# Altium PCB newUA_6.PcbDoc
Units mm, origin at the board's own origin, x right, y up, seen from the top; angles counter-clockwise.
Board outline 51.43 x 211.58 mm, 2 copper layers (Top Layer, Bottom Layer); 52 components, 48 nets, 274 pads, 0 vias.
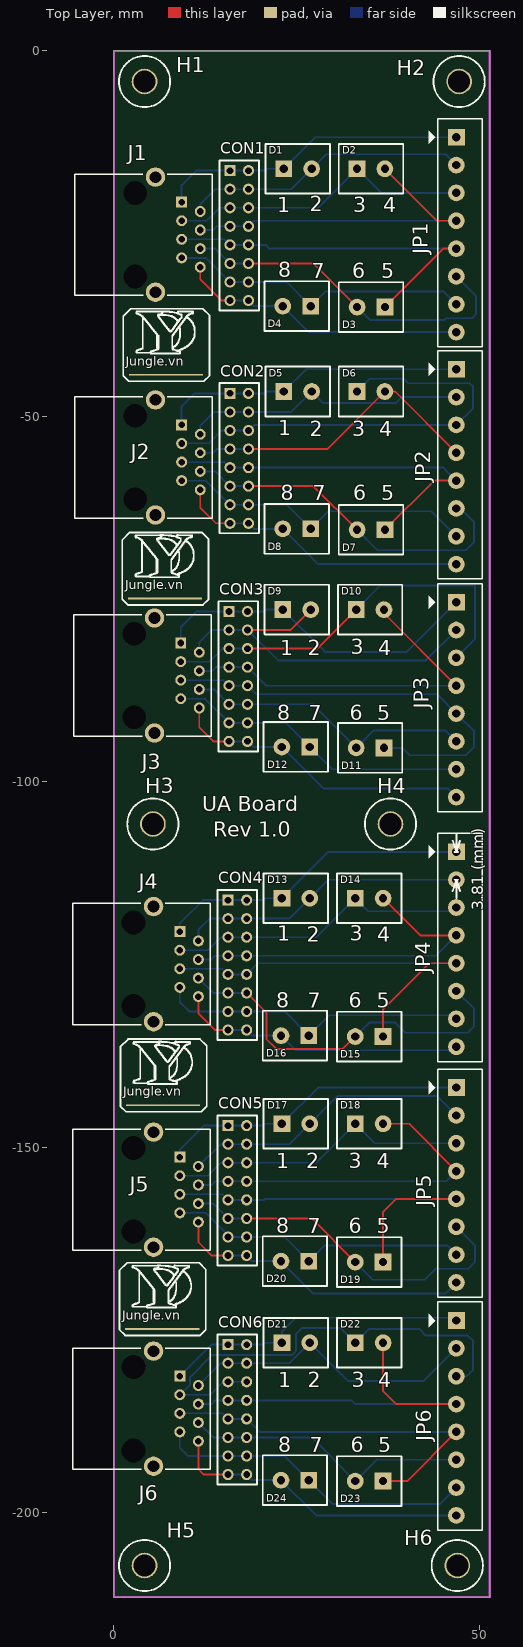
[diagram p0: Top Layer view]
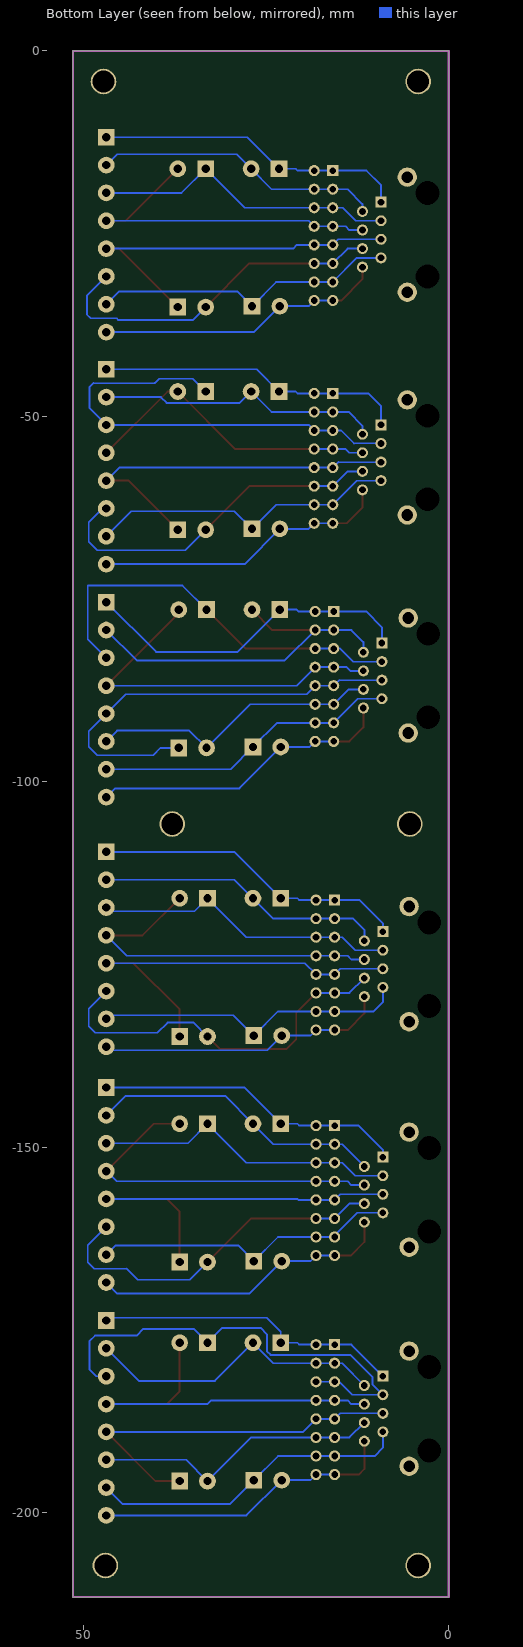
[diagram p1: Bottom Layer view, seen from below]
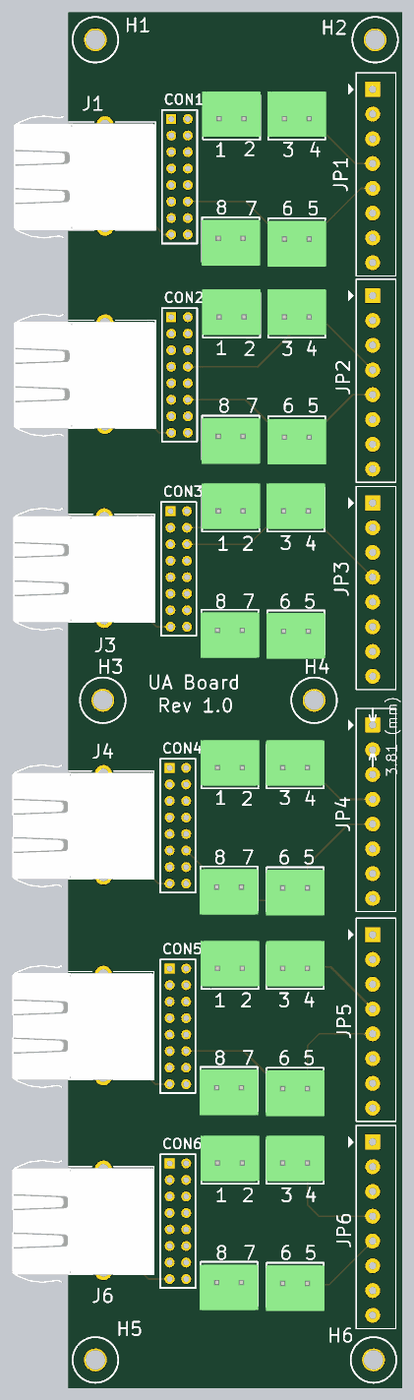
[diagram p2: 3D render of the assembled board from above, using the file's embedded part models]

## Layer stack, top to bottom
Top Solder: solder mask 0.0102, Solder Resist, Dk 3.5
Top Layer: signal copper 0.0356
Dielectric 1: dielectric 0.32, FR-4, Dk 4.8
Bottom Layer: signal copper 0.0356
Bottom Solder: solder mask 0.0102, Solder Resist, Dk 3.5

## Board outline
0,-211.582 51.435,-211.582 51.435,0 0,0

## Design rules (kind name [scope] priority, off if disabled: settings)
Clearance [All] p1: gap=0.254
ComponentClearance [All] p1 off: gap=0.254 collisioncheckmode=3 verticalgap=0.254 showdistances=FALSE
HoleSize [All] p1: absolutevalues=TRUE maxlimit=3.81 minlimit=0.025 maxpercent=80.000 minpercent=20.000
PolygonConnect [All] p1: connectstyle=Relief reliefconductorwidth=0.254 reliefentries=4 polygonreliefangle="90 Angle" airgapwidth=0.254
RoutingVias [All] p1: holewidth=0.61 width=1.016 viastyle="Through Hole" minholewidth=0.61 minwidth=1.016 maxholewidth=3.81 maxwidth=3.81
ShortCircuit [All] p1: allowed=TRUE
SilkToBoardRegionClearance [All] p1 off:
SilkToSilkClearance [All] p1 off: silktosilkclearance=0.254
SilkToSolderMaskClearance [IsPad] p1: minsilkscreentomaskgap=0.051 clearancetoexposedcopper=TRUE
SolderMaskExpansion [All] p1: expansion=0.102
Width [All] p1: maxlimit=1.016 minlimit=0.203 preferedwidth=0.254
24 further rules are at their usual default settings.

## Classes and differential pairs
component class newUA_6: CON1 CON2 CON3 CON4 CON5 CON6 D1 D2 D3 D4 D5 D6 D7 D8 D9 D10 D11 D12 D13 D14 D15 D16 D17 D18 D19 D20 D21 D22 D23 D24 H1 H2 H3 H4 H5 H6 J1 J2 J3 J4 J5 J6 JP1 JP2 JP3 JP4 JP5 JP6

## Components (designator, comment, footprint, x,y, rotation, side; value= is the part's Value field where it differs from the comment)
CON1 "Con8x2" HEAD8x2 15.875,-16.383 r0 top locked
CON2 "Con8x2" HEAD8x2 15.875,-46.863 r0 top locked (schematic designator CON1)
CON3 "Con8x2" HEAD8x2 15.748,-76.708 r0 top locked (schematic designator CON1)
CON4 "Con8x2" HEAD8x2 15.621,-116.205 r0 top locked (schematic designator CON1)
CON5 "Con8x2" HEAD8x2 15.621,-147.066 r0 top locked (schematic designator CON1)
CON6 "Con8x2" HEAD8x2 15.621,-177.038 r0 top locked (schematic designator CON1)
D1 "DOMINO1" DOMINO2_SMALL 23.241,-16.129 r0 top locked
D2 "DOMINO2" DOMINO2_SMALL 33.274,-16.129 r0 top locked
D3 "DOMINO3" DOMINO2_SMALL 37.084,-35.052 r180 top locked
D4 "DOMINO4" DOMINO2_SMALL 26.924,-34.925 r180 top locked
D5 "D5" DOMINO2_SMALL 23.241,-46.609 r0 top locked (schematic designator D1)
D6 "D6" DOMINO2_SMALL 33.274,-46.609 r0 top locked (schematic designator D2)
D7 "D7" DOMINO2_SMALL 37.084,-65.532 r180 top locked (schematic designator D3)
D8 "D8" DOMINO2_SMALL 26.924,-65.405 r180 top locked (schematic designator D4)
D9 "D9" DOMINO2_SMALL 23.114,-76.454 r0 top locked (schematic designator D1)
D10 "D10" DOMINO2_SMALL 33.147,-76.454 r0 top locked (schematic designator D2)
D11 "D11" DOMINO2_SMALL 36.957,-95.377 r180 top locked (schematic designator D3)
D12 "D12" DOMINO2_SMALL 26.797,-95.25 r180 top locked (schematic designator D4)
D13 "D13" DOMINO2_SMALL 22.987,-115.951 r0 top locked (schematic designator D1)
D14 "D14" DOMINO2_SMALL 33.02,-115.951 r0 top locked (schematic designator D2)
D15 "D15" DOMINO2_SMALL 36.83,-134.874 r180 top locked (schematic designator D3)
D16 "D16" DOMINO2_SMALL 26.67,-134.747 r180 top locked (schematic designator D4)
D17 "D17" DOMINO2_SMALL 22.987,-146.812 r0 top locked (schematic designator D1)
D18 "D18" DOMINO2_SMALL 33.02,-146.812 r0 top locked (schematic designator D2)
D19 "D19" DOMINO2_SMALL 36.83,-165.735 r180 top locked (schematic designator D3)
D20 "D20" DOMINO2_SMALL 26.67,-165.608 r180 top locked (schematic designator D4)
D21 "D21" DOMINO2_SMALL 22.987,-176.784 r0 top locked (schematic designator D1)
D22 "D22" DOMINO2_SMALL 33.02,-176.784 r0 top locked (schematic designator D2)
D23 "D23" DOMINO2_SMALL 36.83,-195.707 r180 top locked (schematic designator D3)
D24 "D24" DOMINO2_SMALL 26.67,-195.58 r180 top locked (schematic designator D4)
H1 "Hole 3mm" Hole_3mm 4.191,-4.191 r0 top (schematic designator H7)
H2 "Hole 3mm" Hole_3mm 47.244,-4.191 r0 top (schematic designator H8)
H3 "Hole 3mm" Hole_3mm 5.334,-105.791 r0 top (schematic designator H9)
H4 "Hole 3mm" Hole_3mm 37.846,-105.791 r0 top (schematic designator H10)
H5 "Hole 3mm" Hole_3mm 4.191,-207.264 r0 top (schematic designator H11)
H6 "Hole 3mm" Hole_3mm 46.99,-207.264 r0 top (schematic designator H12)
J1 "CON-RJ45-10-RA" RJ45_TME 7.366,-25.146 r270 top locked
J2 "CON-RJ45-10-RA" RJ45_TME 7.366,-55.626 r270 top locked (schematic designator J1)
J3 "CON-RJ45-10-RA" RJ45_TME 7.239,-85.471 r270 top locked (schematic designator J1)
J4 "CON-RJ45-10-RA" RJ45_TME 7.112,-124.968 r270 top locked (schematic designator J1)
J5 "CON-RJ45-10-RA" RJ45_TME 7.112,-155.829 r270 top locked (schematic designator J1)
J6 "CON-RJ45-10-RA" RJ45_TME 7.112,-185.801 r270 top locked (schematic designator J1)
JP1 "JP8" CON8mod 46.863,-11.811 r270 top
JP2 "JP8" CON8mod 46.863,-43.561 r270 top
JP3 "JP8" CON8mod 46.863,-75.438 r270 top
JP4 "JP8" CON8mod 46.863,-109.601 r270 top
JP5 "JP8" CON8mod 46.863,-141.859 r270 top
JP6 "JP8" CON8mod 46.863,-173.736 r270 top
? "Jungle" Jungle 1178.56,1157.097 r0 top
? "Jungle" Jungle 1178.179,1057.148 r0 top
? "Jungle" Jungle 1178.687,1187.704 r0 top
? "Jungle" Jungle 1178.306,1087.755 r0 top

## Footprints (in the part's own frame and the unit in brackets; to place one, negate y for a bottom-side part, rotate by r counter-clockwise, add the part's x,y. Pads: shape width x height; smd on the part's side, far side on the other; paste and mask are expansions set on the pad)
CON8mod [mm]
  rect 2.29x2.29 hole 1.14: 1(0,0)
  round 2.29 hole 1.14: 2(3.81,0) 3(7.62,0) 4(11.43,0) 5(15.24,0) 6(19.05,0) 7(22.86,0) 8(26.67,0)
  silkscreen extent -2.54,-3.8 28.7,3.56
DOMINO2_SMALL [mm]
  rect 2.29x2.29 hole 1.14: 1(0,0)
  round 2.29 hole 1.14: 2(3.81,0)
  silkscreen extent -2.5,-3.4 6.31,3.4, body extent -2.6,-2.99 6.41,4.01, height 7.25
HEAD8x2 [mil]
  rect 60x60 hole 36: 1(0,0)
  round 60 hole 36: 2(0,-100) 3(0,-200) 4(0,-300) 5(0,-400) 6(0,-500) 7(0,-600) 8(0,-700) 9(100,-700) 10(100,-600) 11(100,-500) 12(100,-400) 13(100,-300) 14(100,-200) 15(100,-100) 16(100,0)
  silkscreen extent -57,-754 156,55
Hole_3mm [mil]
  round 138 hole 118: 0(0,0)
  silkscreen extent -138,-138 138,138
Jungle [mil]
  rect 400x10 smd: 1(-46125,-48505)
  silkscreen extent -46355,-48540 -45890,-48149
RJ45_TME [mm] "no tranformer no LEDs"
  rect 1.5x1.5 hole 0.9: 1(-4.445,1.905)
  round 1.5 hole 0.9: 2(-3.175,4.445) 3(-1.905,1.905) 4(-0.635,4.445) 5(0.635,1.905) 6(1.905,4.445) 7(3.175,1.905) 8(4.445,4.445)
  round 2.65 hole 1.6: MH1(-7.875,-1.685) MH2(7.875,-1.685)
  round 2.95 hole 3.25 unplated: MH3(-5.715,-4.445) MH4(5.715,-4.445)
  Bottom Layer lines w0.3: -5.7,-4.46 -5.715,-4.445
  silkscreen extent -8.3,-12.72 8.3,6.08, body extent -9.35,-15.75 9.65,6.1, height 15.17

## Part data
D1 D2 D3 D4 D5 D6 D7 D8 D9 D10 D11 D12 D13 D14 D15 D16 D17 D18 D19 D20 D21 D22 D23 D24: library part "Domino 2"
H1 H2 H3 H4 H5 H6: library part Hole_3mm
J1 J2 J3 J4 J5 J6: "Right Angle, Standard Profile, External Shield PCB Jack"
JP1 JP2 JP3 JP4 JP5 JP6: library part Con8, "Connector 8"

## Nets (pads, with @x,y where several pads share a name; then routed paths per layer and width w, separated by ;. In a path a pad name is that pad's centre, name@x,y a point inside that pad or via, vN(x,y) a via of type N, cw(c..) or ccw(c..) an arc to the next point about the centre after c; other vN are vias at no path point)
1: CON1.1 CON1.16 D1.1 J1.1 JP1.1 | length 42.6
  Bottom Layer w0.254: J1.1 9.271,-18.37 11.258,-16.383 CON1.1 CON1.16 20.701,-16.383 20.955,-16.129 D1.1 27.559,-11.811 JP1.1
2: CON1.2 CON1.15 D1.2 J1.2 JP1.2 | length 39.5
  Bottom Layer w0.254: J1.2 11.811,-20.955 13.843,-18.923 CON1.2 CON1.15 24.257,-18.923 D1.2 29.032,-14.148 45.39,-14.148 JP1.2
2_1: CON2.1 CON2.16 D5.1 J2.1 JP2.1 | length 42.2
  Bottom Layer w0.254: J2.1 9.271,-48.641 11.049,-46.863 CON2.1 CON2.16 20.701,-46.863 20.955,-46.609 D5.1 26.289,-43.561 JP2.1
2_2: CON2.2 CON2.15 D5.2 J2.2 JP2.2 | length 39.1
  Bottom Layer w0.254: J2.2 11.811,-51.308 13.716,-49.403 CON2.2 CON2.15 24.257,-49.403 D5.2 28.6,-48.158 38.608,-48.158 39.395,-47.371 JP2.2
2_3: CON2.3 CON2.14 D6.1 J2.3 JP2.3 | length 61.9
  Bottom Layer w0.203: J2.3 12.954,-53.721 ; 40.259,-45.466 48.641,-45.466
  Bottom Layer w0.254: 12.954,-53.721 14.732,-51.943 CON2.3 CON2.14 19.177,-51.181 JP2.3 49.149,-48.895 49.149,-45.974 48.641,-45.466 ; D6.1 35.027,-44.856 39.649,-44.856 40.259,-45.466
2_4: CON2.4 CON2.13 D6.2 J2.4 JP2.4 | length 42
  Top Layer w0.254: CON2.13 29.21,-54.483 D6.2 38.481,-46.609 JP2.4
  Bottom Layer w0.254: J2.4 13.589,-54.991 14.097,-54.483 CON2.4 CON2.13
2_5: CON2.5 CON2.12 D7.1 J2.5 JP2.5 | length 51.2
  Top Layer w0.254: D7.1 43.815,-58.801 JP2.5
  Bottom Layer w0.203: J2.5 15.113,-56.261
  Bottom Layer w0.254: 15.113,-56.261 CON2.5 CON2.12 45.085,-57.023 JP2.5
2_6: CON2.6 CON2.11 D7.2 J2.6 JP2.6 | length 48.3
  Top Layer w0.254: CON2.11 27.305,-59.563 D7.2
  Bottom Layer w0.203: 36.068,-68.326 48.133,-68.326
  Bottom Layer w0.254: J2.6 13.843,-57.531 CON2.6 CON2.11 ; D7.2 36.068,-68.326 ; JP2.6 47.371,-62.611 49.276,-64.516 49.276,-67.183 48.133,-68.326
2_7: CON2.7 CON2.10 D8.1 J2.7 JP2.7 | length 42.7
  Bottom Layer w0.203: J2.7 12.573,-58.801 CON2.7
  Bottom Layer w0.254: CON2.7 CON2.10 23.622,-62.103 D8.1 29.337,-62.992 43.434,-62.992 JP2.7
2_8: CON2.8 CON2.9 D8.2 J2.8 JP2.8 | length 40.7
  Top Layer w0.254: J2.8 11.811,-62.484 13.97,-64.643 CON2.8
  Bottom Layer w0.254: CON2.8 CON2.9 19.177,-65.405 D8.2 27.94,-70.231 JP2.8
3: CON1.3 CON1.14 D2.1 J1.3 JP1.3 | length 41.9
  Bottom Layer w0.254: J1.3 12.7,-23.241 14.478,-21.463 CON1.3 CON1.14 27.94,-21.463 D2.1 36.576,-19.431 JP1.3
3_1: CON3.1 CON3.16 D9.1 J3.1 JP3.1 | length 46.1
  Bottom Layer w0.254: J3.1 9.144,-78.867 11.303,-76.708 CON3.1 CON3.16 20.574,-76.708 20.828,-76.454 D9.1 28.905,-82.245 40.056,-82.245 JP3.1
3_2: CON3.2 CON3.15 D9.2 J3.2 JP3.2 | length 50.5
  Top Layer w0.254: CON3.15 24.13,-79.248 D9.2
  Bottom Layer w0.254: J3.2 11.684,-80.899 13.335,-79.248 CON3.2 CON3.15 22.454,-83.414 42.697,-83.414 JP3.2
3_3: CON3.3 CON3.14 D10.1 J3.3 JP3.3 | length 55.5
  Top Layer w0.254: CON3.14 27.813,-81.788 D10.1
  Bottom Layer w0.203: J3.3 13.081,-83.566
  Bottom Layer w0.254: 13.081,-83.566 14.859,-81.788 CON3.3 CON3.14 ; D10.1 36.449,-73.152 49.403,-73.152 49.403,-80.518 JP3.3
3_4: CON3.4 CON3.13 D10.2 J3.4 JP3.4 | length 51
  Top Layer w0.254: D10.2 36.957,-76.962 JP3.4
  Bottom Layer w0.254: J3.4 13.462,-84.836 13.97,-84.328 CON3.4 CON3.13 20.828,-86.868 JP3.4
3_5: CON3.5 CON3.12 D11.1 J3.5 JP3.5 | length 58.4
  Bottom Layer w0.203: J3.5 14.986,-86.106 ; 40.462,-96.393 48.133,-96.393 49.276,-95.25
  Bottom Layer w0.254: 14.986,-86.106 CON3.5 CON3.12 19.456,-88.036 44.221,-88.036 JP3.5 49.276,-93.091 49.276,-95.25 ; D11.1 39.446,-95.377 40.462,-96.393
3_6: CON3.6 CON3.11 D11.2 J3.6 JP3.6 | length 40.1
  Bottom Layer w0.254: J3.6 13.716,-87.376 CON3.6 CON3.11 27.178,-89.408 D11.2 35.509,-93.015 45.39,-93.015 JP3.6
3_7: CON3.7 CON3.10 D12.1 J3.7 JP3.7 | length 41.7
  Bottom Layer w0.203: J3.7 12.446,-88.646 CON3.7
  Bottom Layer w0.254: CON3.7 CON3.10 23.495,-91.948 D12.1 29.845,-98.298 JP3.7
3_8: CON3.8 CON3.9 D12.2 J3.8 JP3.8 | length 41.8
  Top Layer w0.254: J3.8 11.684,-92.583 13.589,-94.488 CON3.8
  Bottom Layer w0.254: CON3.8 CON3.9 19.05,-95.25 D12.2 28.651,-100.914 45.669,-100.914 JP3.8
4: CON1.4 CON1.13 D2.2 J1.4 JP1.4 | length 48.3
  Top Layer w0.254: D2.2 44.196,-23.241 JP1.4
  Bottom Layer w0.254: J1.4 13.589,-24.511 14.097,-24.003 CON1.4 CON1.13 19.177,-23.241 JP1.4
4_1: CON4.1 CON4.16 D13.1 J4.1 JP4.1 | length 43
  Bottom Layer w0.254: J4.1 9.017,-119.38 12.192,-116.205 CON4.1 CON4.16 20.447,-116.205 20.701,-115.951 D13.1 29.337,-109.601 JP4.1
4_2: CON4.2 CON4.15 D13.2 J4.2 JP4.2 | length 39.7
  Bottom Layer w0.254: J4.2 11.557,-120.269 13.081,-118.745 CON4.2 CON4.15 24.003,-118.745 D13.2 29.337,-113.411 JP4.2
4_3: CON4.3 CON4.14 D14.1 J4.3 JP4.3 | length 41.7
  Bottom Layer w0.203: J4.3 12.827,-123.063 14.605,-121.285
  Bottom Layer w0.254: 14.605,-121.285 CON4.3 CON4.14 27.686,-121.285 D14.1 34.798,-117.729 46.355,-117.729 JP4.3
4_4: CON4.4 CON4.13 D14.2 J4.4 JP4.4 | length 48.8
  Top Layer w0.254: D14.2 41.91,-121.031 JP4.4
  Bottom Layer w0.254: J4.4 13.335,-124.333 13.843,-123.825 CON4.4 CON4.13 44.069,-123.825 JP4.4
4_5: CON4.5 CON4.12 D15.1 J4.5 JP4.5 | length 55.2
  Top Layer w0.254: D15.1 36.83,-131.166 43.155,-124.841 JP4.5
  Bottom Layer w0.203: J4.5 14.859,-125.603
  Bottom Layer w0.254: 14.859,-125.603 CON4.5 CON4.12 19.685,-124.841 JP4.5
4_6: CON4.6 CON4.11 D15.2 J4.6 JP4.6 | length 52.1
  Top Layer w0.254: CON4.11 20.879,-131.623 20.879,-135.255 22.2,-136.576 31.318,-136.576 D15.2
  Bottom Layer w0.203: 39.878,-134.366 48.387,-134.366
  Bottom Layer w0.254: J4.6 13.589,-128.905 CON4.6 CON4.11 ; D15.2 34.925,-132.969 38.481,-132.969 39.878,-134.366 ; JP4.6 49.276,-131.064 49.276,-133.477 48.387,-134.366
4_7: CON4.7 CON4.10 D16.1 J4.7 JP4.7 | length 43.1
  Bottom Layer w0.254: J4.7 9.017,-130.175 10.287,-131.445 CON4.7 CON4.10 23.368,-131.445 D16.1 29.464,-131.953 46.355,-131.953 JP4.7
4_8: CON4.8 CON4.9 D16.2 J4.8 JP4.8 | length 40.2
  Top Layer w0.254: J4.8 11.557,-131.699 13.843,-133.985 CON4.8
  Bottom Layer w0.254: CON4.8 CON4.9 18.923,-134.747 D16.2 24.867,-136.754 46.863,-136.754 JP4.8
5: CON1.5 CON1.12 D3.1 J1.5 JP1.5 | length 51.2
  Top Layer w0.254: D3.1 45.085,-27.051 JP1.5
  Bottom Layer w0.254: J1.5 15.113,-25.781 CON1.5 CON1.12 20.777,-26.543 21.285,-27.051 JP1.5
5_1: CON5.1 CON5.16 D17.1 J5.1 JP5.1 | length 42.4
  Bottom Layer w0.254: J5.1 9.017,-150.368 12.319,-147.066 CON5.1 CON5.16 20.447,-147.066 20.701,-146.812 D17.1 27.94,-141.859 JP5.1
5_2: CON5.2 CON5.15 D17.2 J5.2 JP5.2 | length 40.4
  Bottom Layer w0.254: J5.2 14.605,-149.606 CON5.2 CON5.15 24.003,-149.606 D17.2 30.607,-143.002 44.196,-143.002 JP5.2
5_3: CON5.3 CON5.14 D18.1 J5.3 JP5.3 | length 41.9
  Bottom Layer w0.203: J5.3 12.827,-153.924
  Bottom Layer w0.254: 12.827,-153.924 14.605,-152.146 CON5.3 CON5.14 27.686,-152.146 D18.1 35.687,-149.479 JP5.3
5_4: CON5.4 CON5.13 D18.2 J5.4 JP5.4 | length 48.8
  Top Layer w0.254: D18.2 40.386,-146.812 JP5.4
  Bottom Layer w0.254: J5.4 13.335,-155.194 13.843,-154.686 CON5.4 CON5.13 45.466,-154.686 JP5.4
5_5: CON5.5 CON5.12 D19.1 J5.5 JP5.5 | length 55.8
  Top Layer w0.254: D19.1 36.83,-158.877 38.608,-157.099 JP5.5
  Bottom Layer w0.203: J5.5 14.859,-156.464
  Bottom Layer w0.254: 14.859,-156.464 CON5.5 CON5.12 20.574,-157.226 20.701,-157.099 JP5.5
5_6: CON5.6 CON5.11 D19.2 J5.6 JP5.6 | length 49
  Top Layer w0.254: CON5.11 27.051,-159.766 D19.2
  Bottom Layer w0.203: 44.069,-166.624 48.514,-166.624
  Bottom Layer w0.254: J5.6 13.589,-157.734 CON5.6 CON5.11 ; D19.2 35.433,-168.148 42.545,-168.148 44.069,-166.624 ; JP5.6 49.403,-163.449 49.403,-165.735 48.514,-166.624
5_7: CON5.7 CON5.10 D20.1 J5.7 JP5.7 | length 42.1
  Bottom Layer w0.203: J5.7 12.552,-159.004
  Bottom Layer w0.254: 12.552,-159.004 15.621,-162.073 CON5.7 CON5.10 23.368,-162.306 D20.1 28.829,-163.449 45.593,-163.449 JP5.7
5_8: CON5.8 CON5.9 D20.2 J5.8 JP5.8 | length 41.6
  Top Layer w0.254: J5.8 11.557,-162.992 13.411,-164.846 CON5.8
  Bottom Layer w0.254: CON5.8 CON5.9 18.923,-165.608 D20.2 27.305,-170.053 45.339,-170.053 JP5.8
6: CON1.6 CON1.11 D3.2 J1.6 JP1.6 | length 48.4
  Top Layer w0.254: CON1.11 27.305,-29.083 D3.2
  Bottom Layer w0.254: J1.6 13.843,-27.051 CON1.6 CON1.11 ; D3.2 35.052,-36.83 45.212,-36.83 45.466,-36.576 49.022,-36.576 49.53,-36.068 49.53,-33.528 JP1.6
6_1: CON6.1 CON6.16 D21.1 J6.1 JP6.1 | length 42.2
  Bottom Layer w0.254: J6.1 13.335,-177.038 CON6.1 CON6.16 20.447,-177.038 20.701,-176.784 D21.1 22.987,-175.26 24.892,-173.355 46.482,-173.355 JP6.1
6_2: CON6.2 CON6.15 D21.2 J6.2 JP6.2 | length 41.7
  Bottom Layer w0.254: J6.2 14.605,-179.578 CON6.2 CON6.15 24.003,-179.578 D21.2 32.004,-181.991 42.418,-181.991 JP6.2
6_3: CON6.3 CON6.14 D22.1 J6.3 JP6.3 | length 64.7
  Bottom Layer w0.203: J6.3 13.208,-183.896
  Bottom Layer w0.254: J6.3 10.414,-182.499 10.414,-181.483 13.462,-178.435 24.384,-178.435 24.892,-177.927 24.892,-175.616 25.756,-174.752 30.988,-174.752 D22.1 34.925,-174.879 41.783,-174.879 42.697,-175.793 48.412,-175.793 49.149,-176.53 49.149,-180.467 48.26,-181.356 JP6.3 ; 13.208,-183.896 14.986,-182.118 CON6.3 CON6.14
6_4: CON6.4 CON6.13 D22.2 J6.4 JP6.4 | length 53.1
  Top Layer w0.254: D22.2 36.83,-183.388 38.608,-185.166 JP6.4
  Bottom Layer w0.254: J6.4 13.335,-185.166 13.843,-184.658 CON6.4 CON6.13 32.512,-184.658 33.02,-185.166 JP6.4
6_5: CON6.5 CON6.12 D23.1 J6.5 JP6.5 | length 51.7
  Top Layer w0.254: D23.1 40.132,-195.707 JP6.5
  Bottom Layer w0.203: J6.5 14.859,-186.436
  Bottom Layer w0.254: 14.859,-186.436 CON6.5 CON6.12 19.939,-188.976 JP6.5
6_6: CON6.6 CON6.11 D23.2 J6.6 JP6.6 | length 39.8
  Bottom Layer w0.254: J6.6 13.589,-189.738 CON6.6 CON6.11 27.051,-189.738 D23.2 35.941,-192.786 JP6.6
6_7: CON6.7 CON6.10 D24.1 J6.7 JP6.7 | length 44.1
  Bottom Layer w0.254: J6.7 9.017,-191.135 10.16,-192.278 CON6.7 CON6.10 23.368,-192.278 D24.1 29.947,-198.857 44.602,-198.857 JP6.7
6_8: CON6.8 CON6.9 D24.2 J6.8 JP6.8 | length 41.7
  Top Layer w0.254: J6.8 11.557,-194.056 12.319,-194.818 CON6.8
  Bottom Layer w0.254: CON6.8 CON6.9 18.923,-195.58 D24.2 27.686,-200.406 JP6.8
7: CON1.7 CON1.10 D4.1 J1.7 JP1.7 | length 41.9
  Bottom Layer w0.254: J1.7 12.573,-28.321 CON1.7 CON1.10 23.622,-31.623 D4.1 28.905,-32.944 45.136,-32.944 JP1.7
8: CON1.8 CON1.9 D4.2 J1.8 JP1.8 | length 39.7
  Top Layer w0.254: J1.8 11.811,-31.242 14.732,-34.163 CON1.8
  Bottom Layer w0.254: CON1.8 CON1.9 19.177,-34.925 D4.2 26.67,-38.481 JP1.8
pads on no net: ?.1 H1.0 H2.0 H3.0 H4.0 H5.0 H6.0 J1.MH1 J1.MH2 J1.MH3 J1.MH4 J2.MH1 J2.MH2 J2.MH3 J2.MH4 J3.MH1 J3.MH2 J3.MH3 J3.MH4 J4.MH1 J4.MH2 J4.MH3 J4.MH4 J5.MH1 J5.MH2 J5.MH3 J5.MH4 J6.MH1 J6.MH2 J6.MH3 J6.MH4

## Keep-outs
Keep-Out Layer:
  the board outline again, w0.3

## Silkscreen, mask and mechanical layers (free items; w line width, h text height)
Top Overlay:
  lines w0.254: 46.355,-114.935 46.863,-113.411 ; 46.355,-108.077 46.863,-109.601 ; 46.609,-113.411 47.117,-113.411 ; 46.609,-109.601 47.117,-109.601 ; 46.863,-115.951 46.863,-113.411 ; 46.863,-107.061 46.863,-109.601 ; 47.371,-114.935 46.863,-113.411 ; 47.371,-108.077 46.863,-109.601
  text "2" at 26.797,-21.971 h2.03
  text "1" at 22.352,-22.098 h2.03
  text "3" at 32.766,-22.098 h2.03
  text "4" at 36.83,-22.098 h2.03
  text "8" at 22.479,-30.988 h2.03
  text "7" at 27.051,-31.115 h2.03
  text "6" at 32.639,-31.115 h2.03
  text "5" at 36.576,-31.115 h2.03
  text "1" at 22.479,-52.578 h2.03
  text "2" at 26.797,-52.705 h2.03
  text "3" at 32.639,-52.705 h2.03
  text "4" at 36.322,-52.705 h2.03
  text "8" at 22.86,-61.468 h2.03
  text "7" at 27.178,-61.468 h2.03
  text "6" at 32.766,-61.468 h2.03
  text "5" at 36.576,-61.468 h2.03
  text "3" at 32.385,-82.55 h2.03
  text "1" at 22.733,-82.677 h2.03
  text "2" at 26.543,-82.677 h2.03
  text "4" at 36.195,-82.677 h2.03
  text "8" at 22.352,-91.567 h2.03
  text "7" at 26.67,-91.567 h2.03
  text "6" at 32.258,-91.567 h2.03
  text "5" at 36.068,-91.567 h2.03
  text "UA Board" at 12.065,-104.013 h2.03
  text "Rev 1.0" at 13.589,-107.569 h2.03
  text "3.81 (mm)" at 50.52,-117.625 h1.52 r90
  text "1" at 22.352,-121.793 h2.03
  text "3" at 32.258,-121.793 h2.03
  text "2" at 26.416,-121.92 h2.03
  text "4" at 36.068,-121.92 h2.03
  text "8" at 22.225,-130.937 h2.03
  text "7" at 26.543,-130.937 h2.03
  text "6" at 32.131,-130.937 h2.03
  text "5" at 35.941,-130.937 h2.03
  text "1" at 22.225,-152.908 h2.03
  text "2" at 26.289,-152.908 h2.03
  text "3" at 32.131,-152.908 h2.03
  text "4" at 35.941,-152.908 h2.03
  text "8" at 22.225,-161.798 h2.03
  text "7" at 26.543,-161.798 h2.03
  text "6" at 32.131,-161.798 h2.03
  text "5" at 35.941,-161.798 h2.03
  text "1" at 22.479,-182.88 h2.03
  text "2" at 26.543,-182.88 h2.03
  text "3" at 32.512,-182.88 h2.03
  text "4" at 36.195,-182.88 h2.03
  text "8" at 22.479,-191.77 h2.03
  text "7" at 26.797,-191.77 h2.03
  text "6" at 32.385,-191.77 h2.03
  text "5" at 36.195,-191.77 h2.03

## Text inside footprints (layer, text, board x,y; h text height)
?: Top Overlay "Jungle.vn" at 1.27,-143.002 h1.27
?: Top Overlay "Jungle.vn" at 1.651,-43.053 h1.27
?: Top Overlay "Jungle.vn" at 1.143,-173.609 h1.27
?: Top Overlay "Jungle.vn" at 1.524,-73.66 h1.27